# Altium PCB PCB_LogicDesign.PcbDoc
Units mil, origin at the board's own origin, x right, y up, seen from the top; angles counter-clockwise.
Board outline 3385.83 x 2598.43 mil, 2 copper layers (Top Layer, Bottom Layer); 69 components, 46 nets, 202 pads, 8 vias.
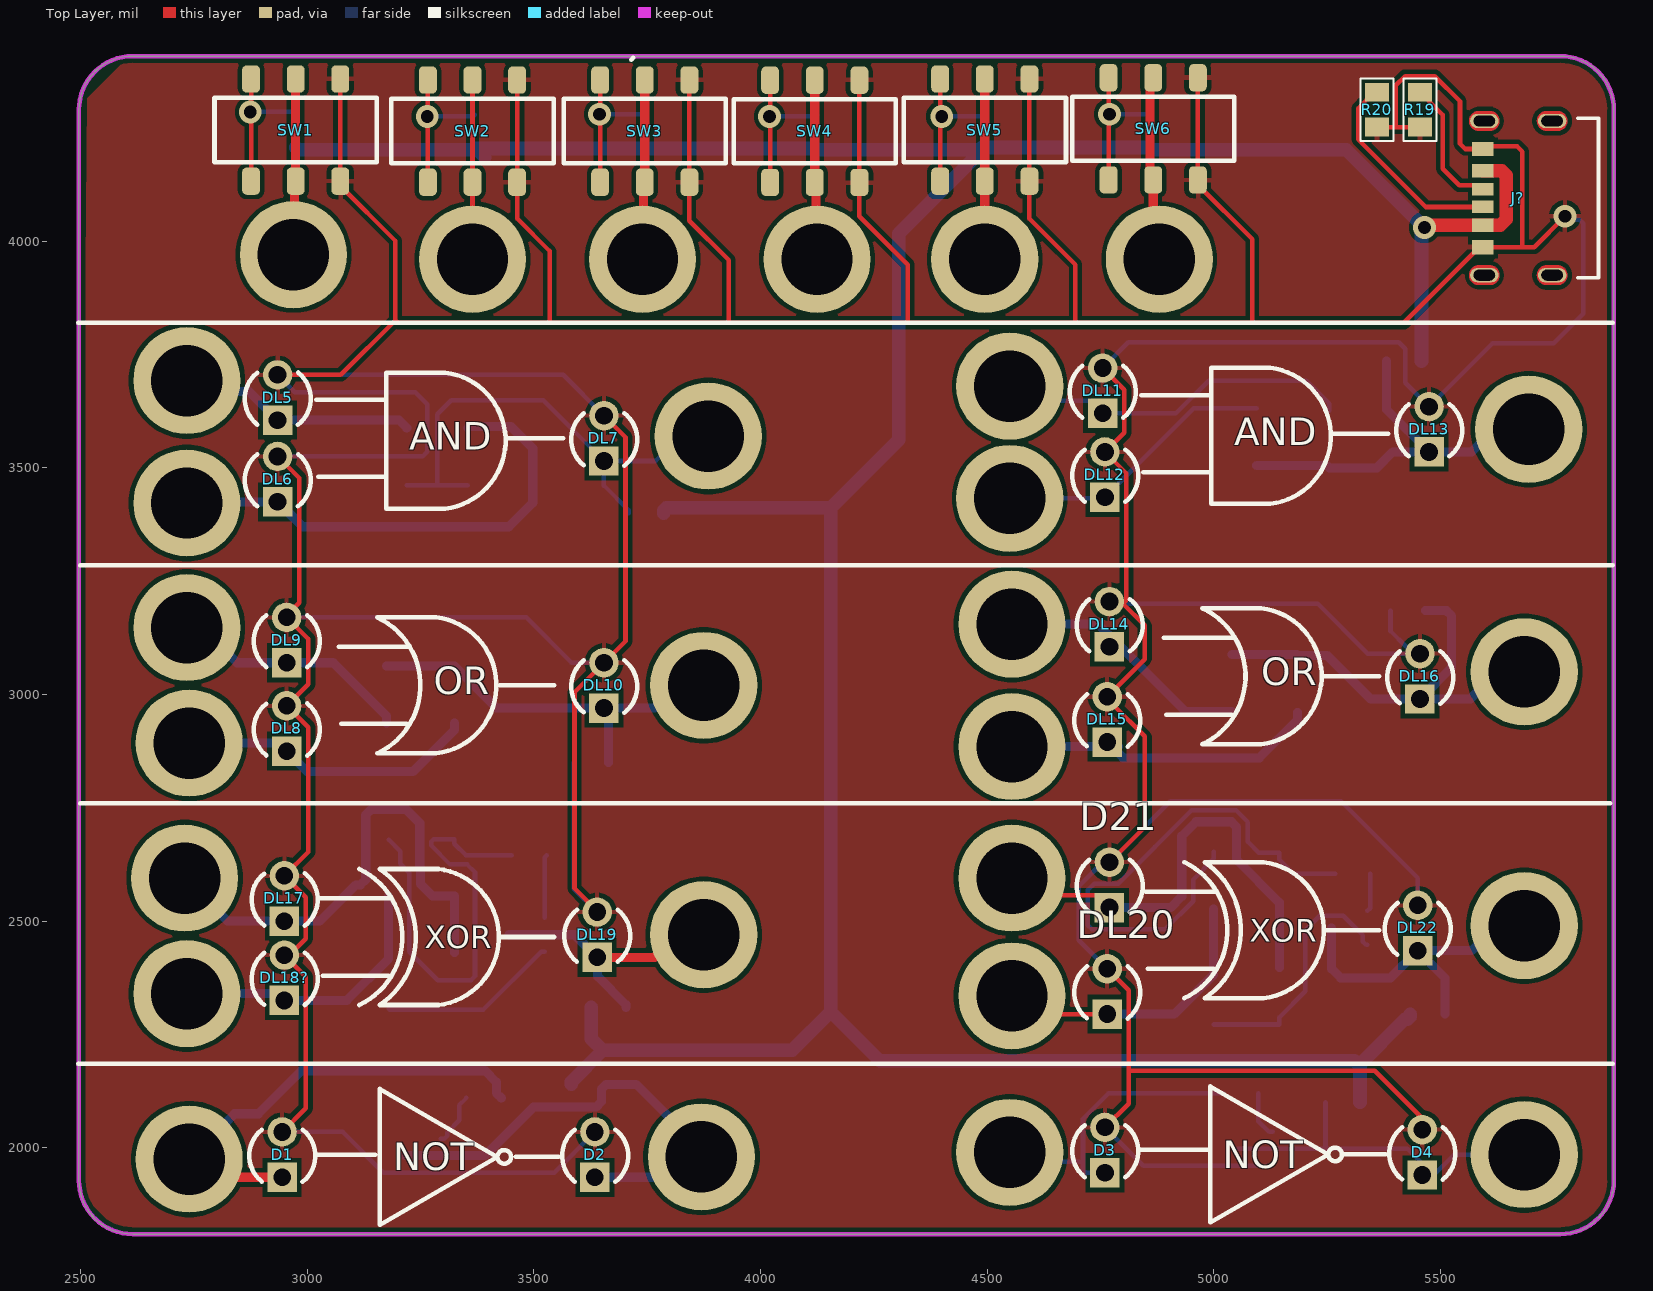
[diagram p0: Top Layer view]
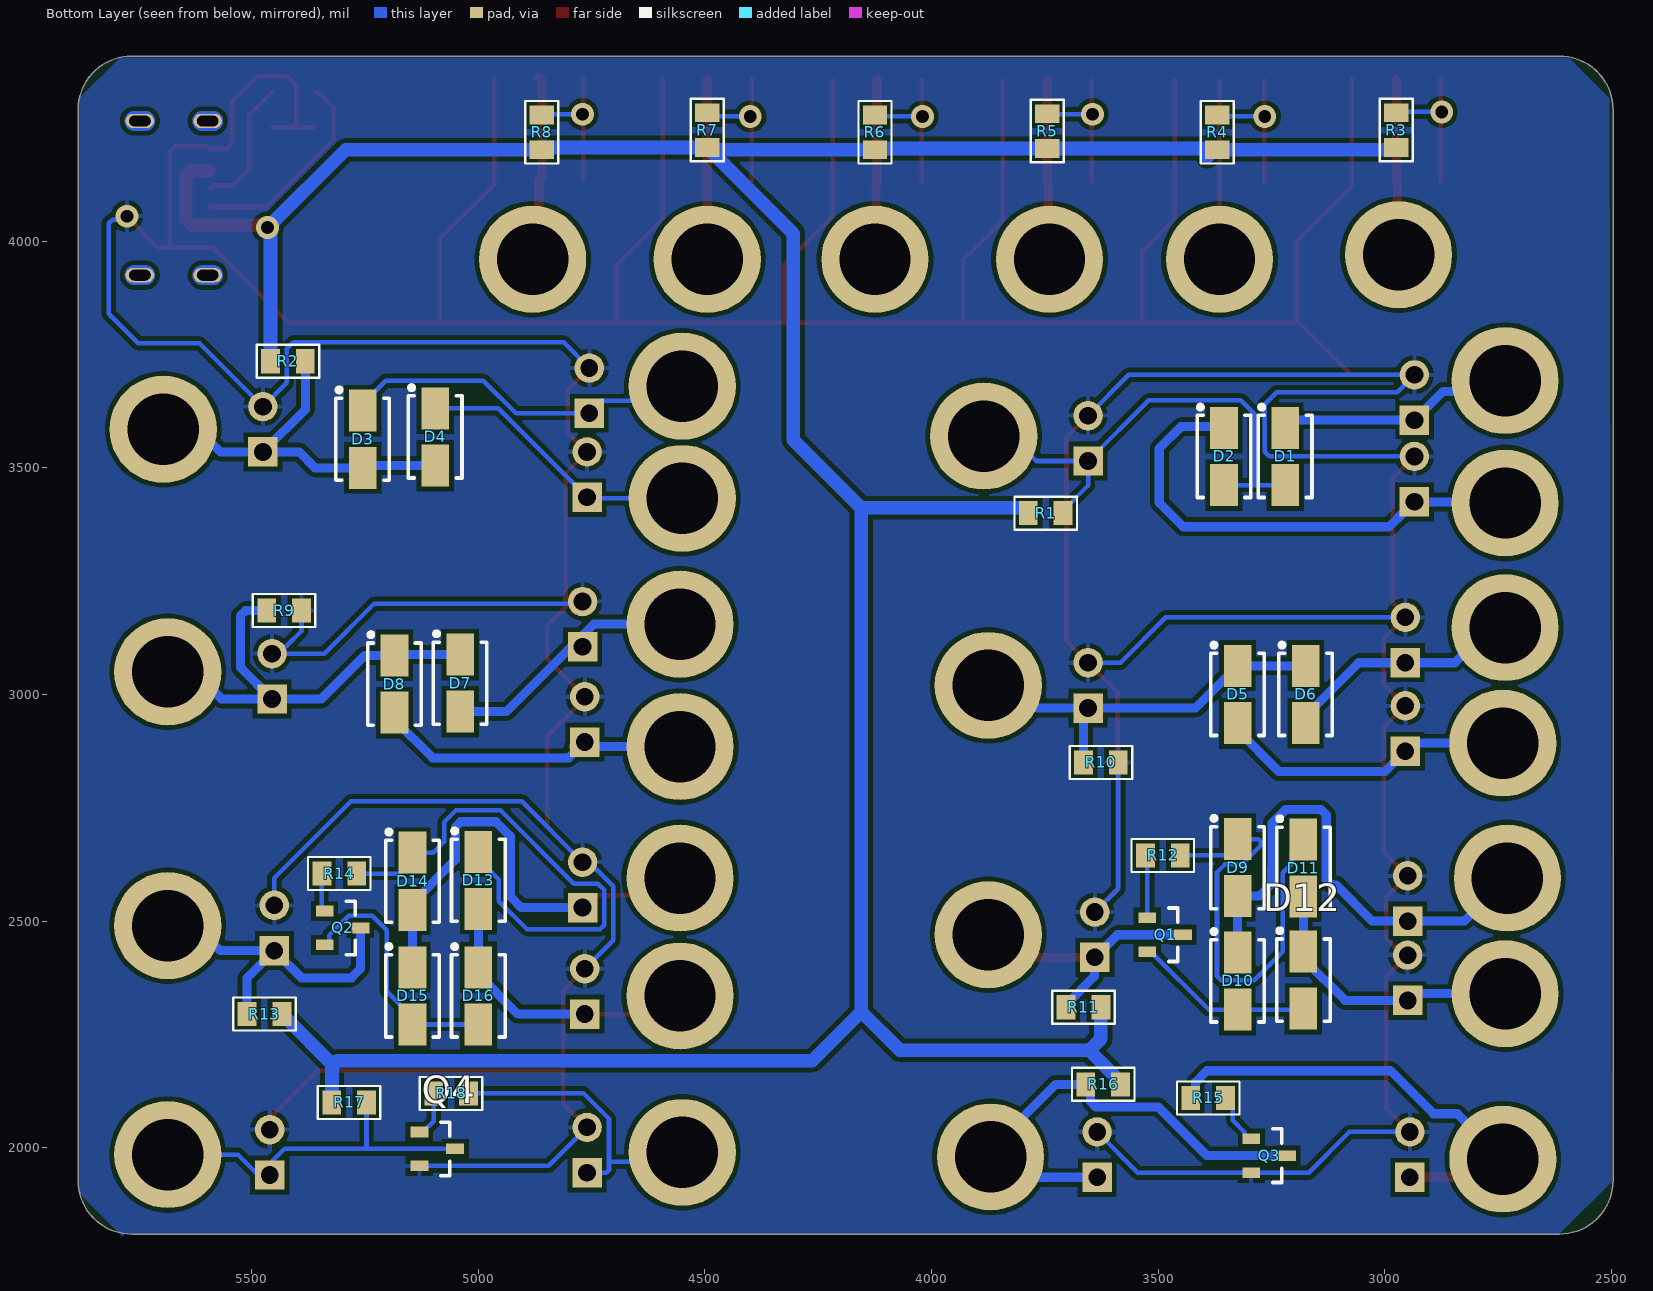
[diagram p1: Bottom Layer view, seen from below]
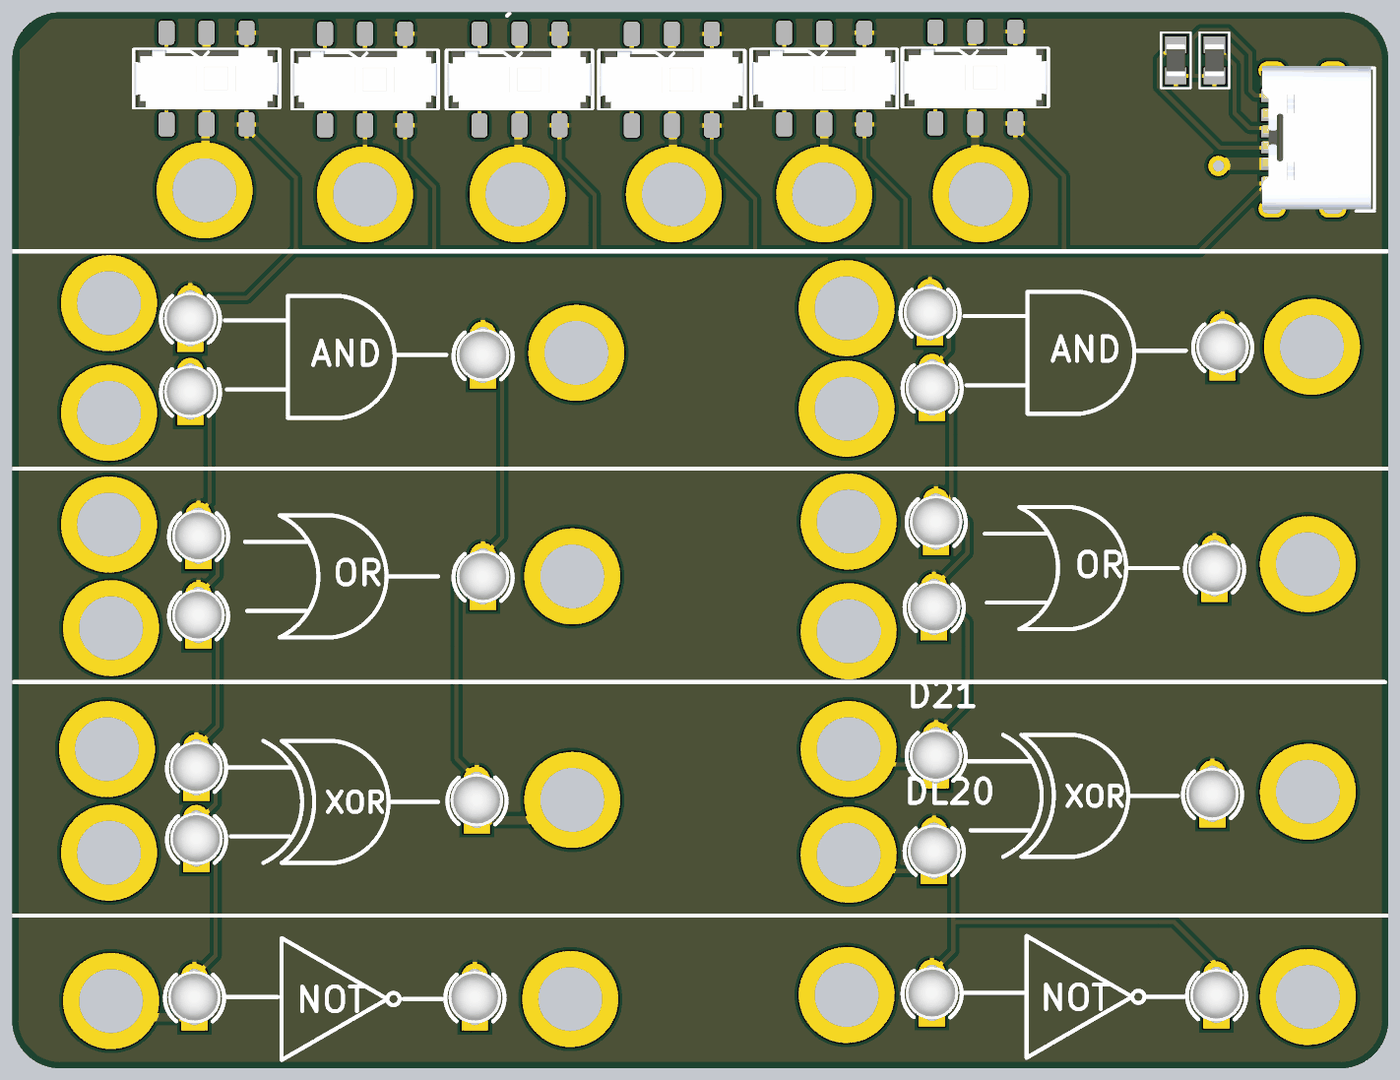
[diagram p2: 3D render of the assembled board from above, using the file's embedded part models]
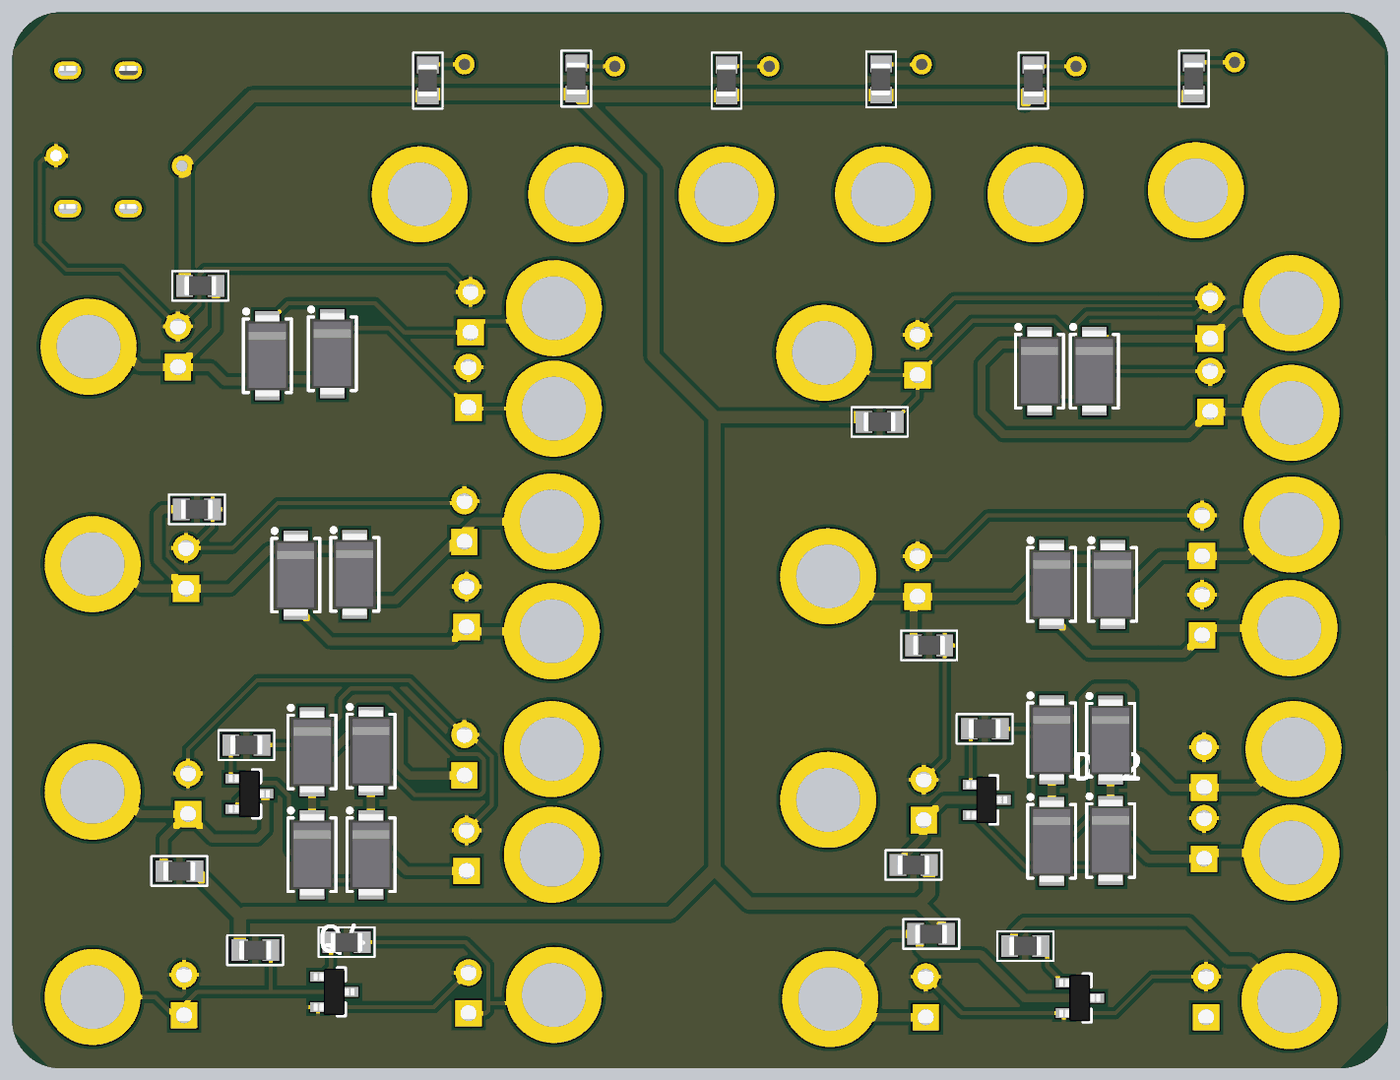
[diagram p3: 3D render of the assembled board from below, using the file's embedded part models]

## Layer stack, top to bottom
Top Solder: solder mask 0.4, Solder Resist, Dk 3.5
Top Layer: signal copper 1.4
Dielectric 1: dielectric 12.6, FR-4, Dk 4.8
Bottom Layer: signal copper 1.4
Bottom Solder: solder mask 0.4, Solder Resist, Dk 3.5

## Board outline
2496.93,1927.83 ccw(c2615.04,1927.83) 2615.04,1809.72 5764.65,1809.72 ccw(c5764.65,1927.83) 5882.76,1927.83 5882.76,4290.04 ccw(c5764.65,4290.04) 5764.65,4408.15 2615.04,4408.15 ccw(c2615.04,4290.04) 2496.93,4290.04

## Design rules (kind name [scope] priority, off if disabled: settings)
Clearance [All] p1: gap=10 ignorepadtopadclearanceinfootprint=FALSE except(0: Arc-Hole Track-Hole SMDPad-Hole THPad-Hole Via-Hole Fill-Hole Poly-Hole Region-Hole Text-Hole)
PolygonConnect [All] p1: connectstyle=Relief reliefconductorwidth=10 reliefentries=4 polygonreliefangle="90 Angle" airgapwidth=10
RoutingVias [All] p1: holewidth=28 width=50 viastyle="Through Hole" minholewidth=28 minwidth=50 maxholewidth=28 maxwidth=50
SolderMaskExpansion [All] p1: expansion=4 istentingtop=FALSE
Width [All] p1: maxlimit=30 minlimit=10 preferedwidth=10 minimp=50.000000 maximp=50.000000 favimp=50.000000
30 further rules are at their usual default settings.

## Classes and differential pairs
component class Sch_LogicDesign: D1 D2 D3 D4 D5 D6 D7 D8 D9 D10 D11 D12 D13 D14 D15 D16 D21 DL5 DL6 DL7 DL8 DL9 DL10 DL11 DL12 DL13 DL14 DL15 DL16 DL17 DL18? DL19 DL20 DL22 J? Q1 Q2 Q3 Q4 R1 R2 R3 R4 R5 R6 R7 R8 R9 R10 R11 R12 R13 R14 R15 R16 R17 R18 R19 R20 SW1 SW2 SW3 SW4 SW5 SW6

## Components (designator, comment, footprint, x,y, rotation, side; value= is the part's Value field where it differs from the comment)
D1 "Led" "LED 3MM - red" 2945,1985 r90 top
D1 "Diode" "DO-214AC (SMA)" 3220,3525 r90 bottom
D2 "Led" "LED 3MM - red" 3635,1985 r90 top
D2 "Diode" "DO-214AC (SMA)" 3355,3525 r90 bottom
D3 "Led" "LED 3MM - red" 4760,1995 r90 top
D3 "Diode" "DO-214AC (SMA)" 5255,3562.99 r90 bottom
D4 "Led" "LED 3MM - red" 5460,1990 r90 top
D4 "Diode" "DO-214AC (SMA)" 5095,3567.99 r90 bottom
D5 "Diode" "DO-214AC (SMA)" 3325,3000 r90 bottom
D6 "Diode" "DO-214AC (SMA)" 3175,3000 r90 bottom
D7 "Diode" "DO-214AC (SMA)" 5040,3025 r90 bottom
D8 "Diode" "DO-214AC (SMA)" 5185,3022.99 r90 bottom
D9 "Diode" "DO-214AC (SMA)" 3325,2617.99 r90 bottom
D10 "Diode" "DO-214AC (SMA)" 3325,2367.99 r90 bottom
D11 "Diode" "DO-214AC (SMA)" 3180,2617.01 r90 bottom
D12 "Diode" "DO-214AC (SMA)" 3180,2370 r90 bottom
D13 "Diode" "DO-214AC (SMA)" 5000,2590 r90 bottom
D14 "Diode" "DO-214AC (SMA)" 5145,2587.99 r90 bottom
D15 "Diode" "DO-214AC (SMA)" 5145,2335 r90 bottom
D16 "Diode" "DO-214AC (SMA)" 5000,2335 r90 bottom
D21 "Led" "LED 3MM - red" 4770,2580 r90 top
DL5 "Led" "LED 3MM - red" 2935,3655 r90 top
DL6 "Led" "LED 3MM - red" 2935,3475 r90 top
DL7 "Led" "LED 3MM - red" 3655,3565 r90 top
DL8 "Led" "LED 3MM - red" 2955,2925 r90 top
DL9 "Led" "LED 3MM - red" 2955,3120 r90 top
DL10 "Led" "LED 3MM - red" 3655,3020 r90 top
DL11 "Led" "LED 3MM - red" 4755,3670 r90 top
DL12 "Led" "LED 3MM - red" 4760,3485 r90 top
DL13 "Led" "LED 3MM - red" 5475,3585 r90 top
DL14 "Led" "LED 3MM - red" 4770,3155 r90 top
DL15 "Led" "LED 3MM - red" 4765,2945 r90 top
DL16 "Led" "LED 3MM - red" 5455,3040 r90 top
DL17 "Led" "LED 3MM - red" 2950,2550 r90 top
DL18? "Led" "LED 3MM - red" 2950,2375 r90 top
DL19 "Led" "LED 3MM - red" 3640,2470 r90 top
DL20 "Led" "LED 3MM - red" 4765,2345 r90 top
DL22 "Led" "LED 3MM - red" 5450,2485 r90 top
J? "USB4125-GF-A-0190_REVA2" GCT_USB4125-GF-A-0190_REVA2 5715,4095 r90 top
Q1 "Transistor NPN" SOT-23 3485,2470 r180 bottom
Q2 "Transistor NPN" SOT-23 5299.37,2485 r180 bottom
Q3 "Transistor NPN" SOT-23 3255.63,1982.6 r180 bottom
Q4 "Transistor NPN" SOT-23 5090.63,1997.6 r180 bottom
R1 "R" "R 0805" 3748.39,3400 r0 bottom
R2 "R" "R 0805" 5420,3735 r0 bottom
R3 "R" "R 0805" 2975,4245 r270 bottom
R4 "R" "R 0805" 3370,4240 r270 bottom
R5 "R" "R 0805" 3745,4242.7 r270 bottom
R6 "R" "R 0805" 4125,4240 r270 bottom
R7 "R" "R 0805" 4495,4245 r270 bottom
R8 "R" "R 0805" 4860,4240 r270 bottom
R9 "R" "R 0805" 5428.39,3185 r0 bottom
R10 "R" "R 0805" 3626.61,2850 r0 bottom
R11 "R" "R 0805" 3665,2310 r180 bottom
R12 "R" "R 0805" 3490,2645 r0 bottom
R13 "R" "R 0805" 5471.61,2295 r180 bottom
R14 "R" "R 0805" 5306.61,2605 r0 bottom
R15 "R" "R 0805" 3390,2110 r0 bottom
R16 "R" "R 0805" 3621.61,2140 r180 bottom
R17 "R" "R 0805" 5285,2100 r0 bottom
R18 "R" "R 0805" 5060,2120 r180 bottom
R19 "R" "R 0805" 5455,4290 r90 top
R20 "R" "R 0805" 5360,4290 r90 top
SW1 "SW 22D18G2" MST22D18G2 2975,4245 r180 top
SW2 "SW 22D18G2" MST22D18G2 3365,4242.7 r180 top
SW3 "SW 22D18G2" MST22D18G2 3745,4242.7 r180 top
SW4 "SW 22D18G2" MST22D18G2 4120,4242.3 r180 top
SW5 "SW 22D18G2" MST22D18G2 4495,4245 r180 top
SW6 "SW 22D18G2" MST22D18G2 4866.57,4247.7 r180 top

## Footprints (in the part's own frame and the unit in brackets; to place one, negate y for a bottom-side part, rotate by r counter-clockwise, add the part's x,y. Pads: shape width x height; smd on the part's side, far side on the other; paste and mask are expansions set on the pad)
"DO-214AC (SMA)" [mm] "Molded Diode, 2-Leads, Body 4.3x2.7mm, IPC Medium Density"
  rect 2.35x1.55 smd: 1(-1.6,0) 2(1.6,0)
  silkscreen extent -2.3,-1.5 2.89,1.5, body extent -2.6,-1.3 2.6,1.3, height 2.4
GCT_USB4125-GF-A-0190_REVA2 [mm]
  rect 0.7x1.2 smd: A5(-0.5,3.08) B5(0.5,3.08)
  rect 0.76x1.2 smd: A9(1.52,3.08) B9(-1.52,3.08)
  rect 0.8x1.2 smd: A12(2.75,3.08) B12(-2.75,3.08)
  oval 0.8x1.6 hole 0.6 slot 1.2 at 90 deg mask+0: S1(-4.32,3) S2(4.32,3) S3(-4.32,-0.8) S4(4.32,-0.8)
  Top Layer region: 4.349,3.849 4.377,3.847 4.406,3.843 4.434,3.838 4.462,3.831 4.49,3.823 4.517,3.813 4.544,3.802 4.57,3.79 4.595,3.776 4.62,3.761 4.643,3.745 4.666,3.727 4.688,3.709 4.709,3.689 4.729,3.668 4.747,3.646 4.765,3.623 4.781,3.6 4.796,3.575 4.81,3.55 4.822,3.524 4.833,3.497 4.843,3.47 4.851,3.442 4.858,3.414 4.863,3.386 4.867,3.357 4.869,3.329 4.87,3.3 4.87,2.7 4.869,2.671 4.867,2.643 4.863,2.614 4.858,2.586 4.851,2.558 4.843,2.53 4.833,2.503 4.822,2.476 4.81,2.45 4.796,2.425 4.781,2.4 4.765,2.377 4.747,2.354 4.729,2.332 4.709,2.311 4.688,2.291 4.666,2.273 4.643,2.255 4.62,2.239 4.595,2.224 4.57,2.21 4.544,2.198 4.517,2.187 4.49,2.177 4.462,2.169 4.434,2.162 4.406,2.157 4.377,2.153 4.349,2.151 4.32,2.15 4.291,2.151 4.263,2.153 4.234,2.157 4.206,2.162 4.178,2.169 4.15,2.177 4.123,2.187 4.096,2.198 4.07,2.21 4.045,2.224 4.02,2.239 3.997,2.255 3.974,2.273 3.952,2.291 3.931,2.311 3.911,2.332 3.893,2.354 3.875,2.377 3.859,2.4 3.844,2.425 3.83,2.45 3.818,2.476 3.807,2.503 3.797,2.53 3.789,2.558 3.782,2.586 3.777,2.614 3.773,2.643 3.771,2.671 3.77,2.7 3.77,3.3 3.771,3.329 3.773,3.357 3.777,3.386 3.782,3.414 3.789,3.442 3.797,3.47 3.807,3.497 3.818,3.524 3.83,3.55 3.844,3.575 3.859,3.6 3.875,3.623 3.893,3.646 3.911,3.668 3.931,3.689 3.952,3.709 3.974,3.727 3.997,3.745 4.02,3.761 4.045,3.776 4.07,3.79 4.096,3.802 4.123,3.813 4.15,3.823 4.178,3.831 4.206,3.838 4.234,3.843 4.263,3.847 4.291,3.849 4.32,3.85
  Top Layer region: -4.291,3.849 -4.263,3.847 -4.234,3.843 -4.206,3.838 -4.178,3.831 -4.15,3.823 -4.123,3.813 -4.096,3.802 -4.07,3.79 -4.045,3.776 -4.02,3.761 -3.997,3.745 -3.974,3.727 -3.952,3.709 -3.931,3.689 -3.911,3.668 -3.893,3.646 -3.875,3.623 -3.859,3.6 -3.844,3.575 -3.83,3.55 -3.818,3.524 -3.807,3.497 -3.797,3.47 -3.789,3.442 -3.782,3.414 -3.777,3.386 -3.773,3.357 -3.771,3.329 -3.77,3.3 -3.77,2.7 -3.771,2.671 -3.773,2.643 -3.777,2.614 -3.782,2.586 -3.789,2.558 -3.797,2.53 -3.807,2.503 -3.818,2.476 -3.83,2.45 -3.844,2.425 -3.859,2.4 -3.875,2.377 -3.893,2.354 -3.911,2.332 -3.931,2.311 -3.952,2.291 -3.974,2.273 -3.997,2.255 -4.02,2.239 -4.045,2.224 -4.07,2.21 -4.096,2.198 -4.123,2.187 -4.15,2.177 -4.178,2.169 -4.206,2.162 -4.234,2.157 -4.263,2.153 -4.291,2.151 -4.32,2.15 -4.349,2.151 -4.377,2.153 -4.406,2.157 -4.434,2.162 -4.462,2.169 -4.49,2.177 -4.517,2.187 -4.544,2.198 -4.57,2.21 -4.595,2.224 -4.62,2.239 -4.643,2.255 -4.666,2.273 -4.688,2.291 -4.709,2.311 -4.729,2.332 -4.747,2.354 -4.765,2.377 -4.781,2.4 -4.796,2.425 -4.81,2.45 -4.822,2.476 -4.833,2.503 -4.843,2.53 -4.851,2.558 -4.858,2.586 -4.863,2.614 -4.867,2.643 -4.869,2.671 -4.87,2.7 -4.87,3.3 -4.869,3.329 -4.867,3.357 -4.863,3.386 -4.858,3.414 -4.851,3.442 -4.843,3.47 -4.833,3.497 -4.822,3.524 -4.81,3.55 -4.796,3.575 -4.781,3.6 -4.765,3.623 -4.747,3.646 -4.729,3.668 -4.709,3.689 -4.688,3.709 -4.666,3.727 -4.643,3.745 -4.62,3.761 -4.595,3.776 -4.57,3.79 -4.544,3.802 -4.517,3.813 -4.49,3.823 -4.462,3.831 -4.434,3.838 -4.406,3.843 -4.377,3.847 -4.349,3.849 -4.32,3.85
  Top Layer region: 4.349,0.049 4.377,0.047 4.406,0.043 4.434,0.038 4.462,0.031 4.49,0.023 4.517,0.013 4.544,0.002 4.57,-0.01 4.595,-0.024 4.62,-0.039 4.643,-0.055 4.666,-0.073 4.688,-0.091 4.709,-0.111 4.729,-0.132 4.747,-0.154 4.765,-0.177 4.781,-0.2 4.796,-0.225 4.81,-0.25 4.822,-0.276 4.833,-0.303 4.843,-0.33 4.851,-0.358 4.858,-0.386 4.863,-0.414 4.867,-0.443 4.869,-0.471 4.87,-0.5 4.87,-1.1 4.869,-1.129 4.867,-1.157 4.863,-1.186 4.858,-1.214 4.851,-1.242 4.843,-1.27 4.833,-1.297 4.822,-1.324 4.81,-1.35 4.796,-1.375 4.781,-1.4 4.765,-1.423 4.747,-1.446 4.729,-1.468 4.709,-1.489 4.688,-1.509 4.666,-1.527 4.643,-1.545 4.62,-1.561 4.595,-1.576 4.57,-1.59 4.544,-1.602 4.517,-1.613 4.49,-1.623 4.462,-1.631 4.434,-1.638 4.406,-1.643 4.377,-1.647 4.349,-1.649 4.32,-1.65 4.291,-1.649 4.263,-1.647 4.234,-1.643 4.206,-1.638 4.178,-1.631 4.15,-1.623 4.123,-1.613 4.096,-1.602 4.07,-1.59 4.045,-1.576 4.02,-1.561 3.997,-1.545 3.974,-1.527 3.952,-1.509 3.931,-1.489 3.911,-1.468 3.893,-1.446 3.875,-1.423 3.859,-1.4 3.844,-1.375 3.83,-1.35 3.818,-1.324 3.807,-1.297 3.797,-1.27 3.789,-1.242 3.782,-1.214 3.777,-1.186 3.773,-1.157 3.771,-1.129 3.77,-1.1 3.77,-0.5 3.771,-0.471 3.773,-0.443 3.777,-0.414 3.782,-0.386 3.789,-0.358 3.797,-0.33 3.807,-0.303 3.818,-0.276 3.83,-0.25 3.844,-0.225 3.859,-0.2 3.875,-0.177 3.893,-0.154 3.911,-0.132 3.931,-0.111 3.952,-0.091 3.974,-0.073 3.997,-0.055 4.02,-0.039 4.045,-0.024 4.07,-0.01 4.096,0.002 4.123,0.013 4.15,0.023 4.178,0.031 4.206,0.038 4.234,0.043 4.263,0.047 4.291,0.049 4.32,0.05
  Top Layer region: -4.291,0.049 -4.263,0.047 -4.234,0.043 -4.206,0.038 -4.178,0.031 -4.15,0.023 -4.123,0.013 -4.096,0.002 -4.07,-0.01 -4.045,-0.024 -4.02,-0.039 -3.997,-0.055 -3.974,-0.073 -3.952,-0.091 -3.931,-0.111 -3.911,-0.132 -3.893,-0.154 -3.875,-0.177 -3.859,-0.2 -3.844,-0.225 -3.83,-0.25 -3.818,-0.276 -3.807,-0.303 -3.797,-0.33 -3.789,-0.358 -3.782,-0.386 -3.777,-0.414 -3.773,-0.443 -3.771,-0.471 -3.77,-0.5 -3.77,-1.1 -3.771,-1.129 -3.773,-1.157 -3.777,-1.186 -3.782,-1.214 -3.789,-1.242 -3.797,-1.27 -3.807,-1.297 -3.818,-1.324 -3.83,-1.35 -3.844,-1.375 -3.859,-1.4 -3.875,-1.423 -3.893,-1.446 -3.911,-1.468 -3.931,-1.489 -3.952,-1.509 -3.974,-1.527 -3.997,-1.545 -4.02,-1.561 -4.045,-1.576 -4.07,-1.59 -4.096,-1.602 -4.123,-1.613 -4.15,-1.623 -4.178,-1.631 -4.206,-1.638 -4.234,-1.643 -4.263,-1.647 -4.291,-1.649 -4.32,-1.65 -4.349,-1.649 -4.377,-1.647 -4.406,-1.643 -4.434,-1.638 -4.462,-1.631 -4.49,-1.623 -4.517,-1.613 -4.544,-1.602 -4.57,-1.59 -4.595,-1.576 -4.62,-1.561 -4.643,-1.545 -4.666,-1.527 -4.688,-1.509 -4.709,-1.489 -4.729,-1.468 -4.747,-1.446 -4.765,-1.423 -4.781,-1.4 -4.796,-1.375 -4.81,-1.35 -4.822,-1.324 -4.833,-1.297 -4.843,-1.27 -4.851,-1.242 -4.858,-1.214 -4.863,-1.186 -4.867,-1.157 -4.869,-1.129 -4.87,-1.1 -4.87,-0.5 -4.869,-0.471 -4.867,-0.443 -4.863,-0.414 -4.858,-0.386 -4.851,-0.358 -4.843,-0.33 -4.833,-0.303 -4.822,-0.276 -4.81,-0.25 -4.796,-0.225 -4.781,-0.2 -4.765,-0.177 -4.747,-0.154 -4.729,-0.132 -4.709,-0.111 -4.688,-0.091 -4.666,-0.073 -4.643,-0.055 -4.62,-0.039 -4.595,-0.024 -4.57,-0.01 -4.544,0.002 -4.517,0.013 -4.49,0.023 -4.462,0.031 -4.434,0.038 -4.406,0.043 -4.377,0.047 -4.349,0.049 -4.32,0.05
  Bottom Layer region: 4.349,3.849 4.377,3.847 4.406,3.843 4.434,3.838 4.462,3.831 4.49,3.823 4.517,3.813 4.544,3.802 4.57,3.79 4.595,3.776 4.62,3.761 4.643,3.745 4.666,3.727 4.688,3.709 4.709,3.689 4.729,3.668 4.747,3.646 4.765,3.623 4.781,3.6 4.796,3.575 4.81,3.55 4.822,3.524 4.833,3.497 4.843,3.47 4.851,3.442 4.858,3.414 4.863,3.386 4.867,3.357 4.869,3.329 4.87,3.3 4.87,2.7 4.869,2.671 4.867,2.643 4.863,2.614 4.858,2.586 4.851,2.558 4.843,2.53 4.833,2.503 4.822,2.476 4.81,2.45 4.796,2.425 4.781,2.4 4.765,2.377 4.747,2.354 4.729,2.332 4.709,2.311 4.688,2.291 4.666,2.273 4.643,2.255 4.62,2.239 4.595,2.224 4.57,2.21 4.544,2.198 4.517,2.187 4.49,2.177 4.462,2.169 4.434,2.162 4.406,2.157 4.377,2.153 4.349,2.151 4.32,2.15 4.291,2.151 4.263,2.153 4.234,2.157 4.206,2.162 4.178,2.169 4.15,2.177 4.123,2.187 4.096,2.198 4.07,2.21 4.045,2.224 4.02,2.239 3.997,2.255 3.974,2.273 3.952,2.291 3.931,2.311 3.911,2.332 3.893,2.354 3.875,2.377 3.859,2.4 3.844,2.425 3.83,2.45 3.818,2.476 3.807,2.503 3.797,2.53 3.789,2.558 3.782,2.586 3.777,2.614 3.773,2.643 3.771,2.671 3.77,2.7 3.77,3.3 3.771,3.329 3.773,3.357 3.777,3.386 3.782,3.414 3.789,3.442 3.797,3.47 3.807,3.497 3.818,3.524 3.83,3.55 3.844,3.575 3.859,3.6 3.875,3.623 3.893,3.646 3.911,3.668 3.931,3.689 3.952,3.709 3.974,3.727 3.997,3.745 4.02,3.761 4.045,3.776 4.07,3.79 4.096,3.802 4.123,3.813 4.15,3.823 4.178,3.831 4.206,3.838 4.234,3.843 4.263,3.847 4.291,3.849 4.32,3.85
  Bottom Layer region: -4.291,3.849 -4.263,3.847 -4.234,3.843 -4.206,3.838 -4.178,3.831 -4.15,3.823 -4.123,3.813 -4.096,3.802 -4.07,3.79 -4.045,3.776 -4.02,3.761 -3.997,3.745 -3.974,3.727 -3.952,3.709 -3.931,3.689 -3.911,3.668 -3.893,3.646 -3.875,3.623 -3.859,3.6 -3.844,3.575 -3.83,3.55 -3.818,3.524 -3.807,3.497 -3.797,3.47 -3.789,3.442 -3.782,3.414 -3.777,3.386 -3.773,3.357 -3.771,3.329 -3.77,3.3 -3.77,2.7 -3.771,2.671 -3.773,2.643 -3.777,2.614 -3.782,2.586 -3.789,2.558 -3.797,2.53 -3.807,2.503 -3.818,2.476 -3.83,2.45 -3.844,2.425 -3.859,2.4 -3.875,2.377 -3.893,2.354 -3.911,2.332 -3.931,2.311 -3.952,2.291 -3.974,2.273 -3.997,2.255 -4.02,2.239 -4.045,2.224 -4.07,2.21 -4.096,2.198 -4.123,2.187 -4.15,2.177 -4.178,2.169 -4.206,2.162 -4.234,2.157 -4.263,2.153 -4.291,2.151 -4.32,2.15 -4.349,2.151 -4.377,2.153 -4.406,2.157 -4.434,2.162 -4.462,2.169 -4.49,2.177 -4.517,2.187 -4.544,2.198 -4.57,2.21 -4.595,2.224 -4.62,2.239 -4.643,2.255 -4.666,2.273 -4.688,2.291 -4.709,2.311 -4.729,2.332 -4.747,2.354 -4.765,2.377 -4.781,2.4 -4.796,2.425 -4.81,2.45 -4.822,2.476 -4.833,2.503 -4.843,2.53 -4.851,2.558 -4.858,2.586 -4.863,2.614 -4.867,2.643 -4.869,2.671 -4.87,2.7 -4.87,3.3 -4.869,3.329 -4.867,3.357 -4.863,3.386 -4.858,3.414 -4.851,3.442 -4.843,3.47 -4.833,3.497 -4.822,3.524 -4.81,3.55 -4.796,3.575 -4.781,3.6 -4.765,3.623 -4.747,3.646 -4.729,3.668 -4.709,3.689 -4.688,3.709 -4.666,3.727 -4.643,3.745 -4.62,3.761 -4.595,3.776 -4.57,3.79 -4.544,3.802 -4.517,3.813 -4.49,3.823 -4.462,3.831 -4.434,3.838 -4.406,3.843 -4.377,3.847 -4.349,3.849 -4.32,3.85
  Bottom Layer region: 4.349,0.049 4.377,0.047 4.406,0.043 4.434,0.038 4.462,0.031 4.49,0.023 4.517,0.013 4.544,0.002 4.57,-0.01 4.595,-0.024 4.62,-0.039 4.643,-0.055 4.666,-0.073 4.688,-0.091 4.709,-0.111 4.729,-0.132 4.747,-0.154 4.765,-0.177 4.781,-0.2 4.796,-0.225 4.81,-0.25 4.822,-0.276 4.833,-0.303 4.843,-0.33 4.851,-0.358 4.858,-0.386 4.863,-0.414 4.867,-0.443 4.869,-0.471 4.87,-0.5 4.87,-1.1 4.869,-1.129 4.867,-1.157 4.863,-1.186 4.858,-1.214 4.851,-1.242 4.843,-1.27 4.833,-1.297 4.822,-1.324 4.81,-1.35 4.796,-1.375 4.781,-1.4 4.765,-1.423 4.747,-1.446 4.729,-1.468 4.709,-1.489 4.688,-1.509 4.666,-1.527 4.643,-1.545 4.62,-1.561 4.595,-1.576 4.57,-1.59 4.544,-1.602 4.517,-1.613 4.49,-1.623 4.462,-1.631 4.434,-1.638 4.406,-1.643 4.377,-1.647 4.349,-1.649 4.32,-1.65 4.291,-1.649 4.263,-1.647 4.234,-1.643 4.206,-1.638 4.178,-1.631 4.15,-1.623 4.123,-1.613 4.096,-1.602 4.07,-1.59 4.045,-1.576 4.02,-1.561 3.997,-1.545 3.974,-1.527 3.952,-1.509 3.931,-1.489 3.911,-1.468 3.893,-1.446 3.875,-1.423 3.859,-1.4 3.844,-1.375 3.83,-1.35 3.818,-1.324 3.807,-1.297 3.797,-1.27 3.789,-1.242 3.782,-1.214 3.777,-1.186 3.773,-1.157 3.771,-1.129 3.77,-1.1 3.77,-0.5 3.771,-0.471 3.773,-0.443 3.777,-0.414 3.782,-0.386 3.789,-0.358 3.797,-0.33 3.807,-0.303 3.818,-0.276 3.83,-0.25 3.844,-0.225 3.859,-0.2 3.875,-0.177 3.893,-0.154 3.911,-0.132 3.931,-0.111 3.952,-0.091 3.974,-0.073 3.997,-0.055 4.02,-0.039 4.045,-0.024 4.07,-0.01 4.096,0.002 4.123,0.013 4.15,0.023 4.178,0.031 4.206,0.038 4.234,0.043 4.263,0.047 4.291,0.049 4.32,0.05
  Bottom Layer region: -4.291,0.049 -4.263,0.047 -4.234,0.043 -4.206,0.038 -4.178,0.031 -4.15,0.023 -4.123,0.013 -4.096,0.002 -4.07,-0.01 -4.045,-0.024 -4.02,-0.039 -3.997,-0.055 -3.974,-0.073 -3.952,-0.091 -3.931,-0.111 -3.911,-0.132 -3.893,-0.154 -3.875,-0.177 -3.859,-0.2 -3.844,-0.225 -3.83,-0.25 -3.818,-0.276 -3.807,-0.303 -3.797,-0.33 -3.789,-0.358 -3.782,-0.386 -3.777,-0.414 -3.773,-0.443 -3.771,-0.471 -3.77,-0.5 -3.77,-1.1 -3.771,-1.129 -3.773,-1.157 -3.777,-1.186 -3.782,-1.214 -3.789,-1.242 -3.797,-1.27 -3.807,-1.297 -3.818,-1.324 -3.83,-1.35 -3.844,-1.375 -3.859,-1.4 -3.875,-1.423 -3.893,-1.446 -3.911,-1.468 -3.931,-1.489 -3.952,-1.509 -3.974,-1.527 -3.997,-1.545 -4.02,-1.561 -4.045,-1.576 -4.07,-1.59 -4.096,-1.602 -4.123,-1.613 -4.15,-1.623 -4.178,-1.631 -4.206,-1.638 -4.234,-1.643 -4.263,-1.647 -4.291,-1.649 -4.32,-1.65 -4.349,-1.649 -4.377,-1.647 -4.406,-1.643 -4.434,-1.638 -4.462,-1.631 -4.49,-1.623 -4.517,-1.613 -4.544,-1.602 -4.57,-1.59 -4.595,-1.576 -4.62,-1.561 -4.643,-1.545 -4.666,-1.527 -4.688,-1.509 -4.709,-1.489 -4.729,-1.468 -4.747,-1.446 -4.765,-1.423 -4.781,-1.4 -4.796,-1.375 -4.81,-1.35 -4.822,-1.324 -4.833,-1.297 -4.843,-1.27 -4.851,-1.242 -4.858,-1.214 -4.863,-1.186 -4.867,-1.157 -4.869,-1.129 -4.87,-1.1 -4.87,-0.5 -4.869,-0.471 -4.867,-0.443 -4.863,-0.414 -4.858,-0.386 -4.851,-0.358 -4.843,-0.33 -4.833,-0.303 -4.822,-0.276 -4.81,-0.25 -4.796,-0.225 -4.781,-0.2 -4.765,-0.177 -4.747,-0.154 -4.729,-0.132 -4.709,-0.111 -4.688,-0.091 -4.666,-0.073 -4.643,-0.055 -4.62,-0.039 -4.595,-0.024 -4.57,-0.01 -4.544,0.002 -4.517,0.013 -4.49,0.023 -4.462,0.031 -4.434,0.038 -4.406,0.043 -4.377,0.047 -4.349,0.049 -4.32,0.05
  silkscreen extent -4.47,-3.4 4.47,-2.25, body extent -4.34,-3.2 4.6,3.7, height 3.26
"LED 3MM - red" [mil]
  rect 65x65 hole 39: 1(-50,0)
  round 65 hole 39: 2(50,0)
  silkscreen extent -60,-73 55,72, body extent -66,-65 64,65, height 207
MST22D18G2 [mm]
  rrect50% 1x1.525 smd: 1(-2.5,2.863) 1(-2.5,-2.863) 2(0,2.863) 2(0,-2.863) 3(2.5,2.863) 3(2.5,-2.863)
  silkscreen extent -4.55,-1.8 4.55,1.8, body extent -4.5,-1.8 4.5,1.8, height 5.5
"R 0805" [mm] "Chip Resistor, 2-Leads, Body 2.0x1.3mm, IPC Medium Density"
  rect 1.05x1.35 smd: 1(-0.975,0) 2(0.975,0)
  silkscreen extent -1.75,-0.92 1.75,0.92, body extent -1,-0.61 1,0.59, height 0.5
SOT-23 [mm] "SOT23, 3-Leads, Body 3.0x2.5mm (max), Pitch 0.95mm, IPC Medium Density"
  rect 1x0.6 smd: 1(-1,0.95) 2(-1,-0.95) 3(1,0)
  silkscreen extent 0.2,-1.5 0.7,1.5, body extent -1.28,-1.46 1.27,1.46, height 0.95

## Part data
D1 D2 D3 D4 D21 DL5 DL6 DL7 DL8 DL9 DL10 DL11 DL12 DL13 DL14 DL15 DL16 DL17 DL18? DL19 DL20 DL22: "Typical LED"
D1 D2 D3 D4 D5 D6 D7 D8 D9 D10 D11 D12 D13 D14 D15 D16: "Default Diode"
J?: "Type C Receptacle, Horizontal, SMT, For Power Charging Only", PACKAGE=None, Availability="No availability data", Check_prices=https://www.snapeda.com/parts/USB4125-GF-A-0190/Global%20Connector%20Technology/view-part/6227012/?ref=eda, MF="Global Connector Technology", MP=USB4125-GF-A-0190, Price=None, SnapEDA_Link=https://www.snapeda.com/parts/USB4125-GF-A-0190/Global%20Connector%20Technology/view-part/6227012/?ref=snap
Q1 Q2 Q3 Q4: "NPN Bipolar Transistor"
R1 R2 R3 R4 R5 R6 R7 R8 R9 R10 R11 R12 R13 R14 R15 R16 R17 R18 R19 R20: library part Resistor, "Resistor"

## Free pads (board coordinates)
  round 236.22 hole 157.48: 2(2730,2595) 2(2735,2340) 2(2735,3147.6) 2(2735,3422.35) 2(2735,3692.35) 2(2740,1975) 2(2740,2892.6) 2(2970,3970) 2(3365,3960) 2(3740,3960) 2(3870,1980) 2(3875,2470) 2(3875,3020) 2(3885,3570) 2(4125,3960) 2(4495,3960) 2(4550,1990) 2(4550,3432.6) 2(4550,3680) 2(4555,2335) 2(4555,2595) 2(4555,2885) 2(4555,3155) 2(4880,3960) 2(5685,1985) 2(5685,2490) 2(5685,3050) 2(5695,3585)

## Via types
v1: diameter 50, hole 28, Top Layer to Bottom Layer, 8 vias

## Nets (pads, with @x,y where several pads share a name; then routed paths per layer and width w, separated by ;. In a path a pad name is that pad's centre, name@x,y a point inside that pad or via, vN(x,y) a via of type N, cw(c..) or ccw(c..) an arc to the next point about the centre after c; other vN are vias at no path point)
+5: J?.A9 J?.B9 R1.2 R2.2 R3.2 R4.2 R5.2 R6.2 R7.2 R8.2 R11.2 R13.2 R16.2 R17.2 | length 7851.5
  Top Layer w30: v1(5465,4030) 5470.41,4030 5475.57,4035.16 5632.14,4035.16 5645.16,4048.18 5645.16,4144.84 5635.16,4154.84 J?.A9@5593.76,4154.84
  Bottom Layer w30: R3.2 2980,4201.61 R4.2 3372.7,4204.31 R4.2@3373.21,4204.31 ; R4.2@3391.57,4185.43 3391.57,4185.94 R4.2@3373.21,4204.31 ; R16.2 3583.23,2145.91 3652.32,2215 ; R11.2 3626.61,2240.71 3652.32,2215 ; R1.2 3786.77,3405.91 3792.44,3411.57 4155,3411.57 ; R7.2@4484.09,4201.61 R6.2 4122.3,4204.31 R5.2 R4.2@3373.21,4204.31 ; R17.2@5322.76,2100.63 5322.76,2179.6 5310.47,2191.89 4263.11,2191.89 4155,2300 ; 5322.76,2184.53 5421.65,2283.43 5427.56,2283.43 5433.23,2289.09 R13.2 ; R2.2 5458.39,4017.97 5465,4024.59 v1(5465,4030) 5464.18,4030 5292.56,4201.61 R8.2 4855,4206.61 4489.09,4206.61 4483.43,4200.94 4483.43,4195.04 4305,4016.61 4305,3561.57 4155,3411.57 ; 3652.32,2215 4070,2215 4155,2300 ; 4155,2300 4155,3411.57
AND_IN1: D1.2@3220,3587.99 DL5.1 pad.2@2735,3692.35 | length 528.2
  Bottom Layer w20: pad.2@2735,3692.35 2758.74,3668.61 2871.39,3668.61 DL5.1 3202.99,3605 D1.2@3220,3587.99
AND_IN2: D2.2@3355,3587.99 DL6.1 pad.2@2735,3422.35 | length 1092.1
  Bottom Layer w20: pad.2@2735,3422.35 2737.65,3425 DL6.1 ; DL6.1@2935.51,3425 2935.51,3424.49 2957.5,3402.5 2958.01,3402.5 2990.51,3370 3445,3370 3497.86,3422.86 3497.86,3542.65 3449.86,3590.65 3357.65,3590.65 D2.2@3355,3587.99
AND_IN3: D3.2@5255,3625.98 DL11.1 pad.2@4550,3680 | length 796.4
  Bottom Layer w10: pad.2@4550,3680 4582.5,3647.5 4727.5,3647.5 DL11.1 4916.72,3620 4988.96,3692.24 5204.49,3692.24 5255,3641.73 D3.2@5255,3625.98
AND_IN4: D4.2@5095,3630.98 DL12.1 pad.2@4550,3432.6 | length 627.2
  Bottom Layer w10: pad.2@4550,3432.6 4757.6,3432.6 DL12.1 4955.98,3630.98 D4.2@5095,3630.98
AND_OUT1: D1.1@3220,3462.01 D2.1@3355,3462.01 DL7.1 pad.2@3885,3570 R1.1 | length 1117.9
  Bottom Layer w10: D1.1@3220,3462.01 3287.5,3462.01 ; D2.1@3355,3462.01 3287.5,3462.01 ; R1.1 3710,3405.91 3655,3460.91 DL7.1 ; pad.2@3885,3570 3823.79,3570 3768.79,3515 DL7.1 ; 3287.5,3462.01 3287.5,3618.48 3318.28,3649.25 3520.75,3649.25 DL7.1
AND_OUT2: D3.1@5255,3500 D4.1@5095,3505 DL13.1 pad.2@5695,3585 R2.1 | length 876
  Bottom Layer w20: D4.1@5095,3505 5250,3505 5255,3500 5360.26,3500 5395.26,3535 DL13.1 ; R2.1 5381.61,3628.39 DL13.1 ; pad.2@5695,3585 5618.79,3585 5568.79,3535 DL13.1
GND: D1.2@2945,2035 D2.2@3635,2035 D3.2@4760,2045 D4.2@5460,2040 D21.2 DL5.2 DL6.2 DL7.2 DL8.2 DL9.2 DL10.2 DL11.2 DL12.2 DL13.2 DL14.2 DL15.2 DL16.2 DL17.2 DL18?.2 DL19.2 DL20.2 DL22.2 J?.A12 J?.B12 Q3.2 Q4.2 R9.1 R10.1 R19.1 R20.1 SW1.1 SW2.1 SW3.1 SW4.1 SW5.1 SW6.1 | length 19815
  Top Layer w10: DL6.2 2982.5,3477.5 2982.5,3202.38 2965,3184.88 DL9.2@2965,3170 ; DL5.2 3074.14,3705 3195,3825.86 ; D1.2@2945,2035 2997.5,2087.5 2997.5,2377.5 DL18?.2 2961.21,2425 2997.5,2461.29 2997.5,2552.5 DL17.2 3002.5,2652.5 3002.5,2927.5 DL8.2 3002.5,3022.5 3002.5,3122.5 DL9.2 ; SW1.1@3073.43,4357.7 3073.43,4132.3 3073.43,4121.97 3195,4000.39 3195,3825.86 ; SW2.1@3463.43,4355.39 3463.43,4130 3463.43,4049.82 3535,3978.25 3535,3820 ; DL19.2 3640,2522.18 3590,2572.18 3590,3005 DL10.2 3702.5,3117.5 3702.5,3567.5 DL7.2 ; SW3.1@3843.43,4355.39 3843.43,4130 3843.43,4044.82 3930,3958.25 3930,3820 ; SW4.1@4218.43,4355 4218.43,4129.61 4218.43,4054.82 4325,3948.25 4325,3820 ; SW5.1@4593.43,4357.7 4593.43,4132.3 4593.43,4049.82 4695,3948.25 4695,3820 ; DL11.2 4802.5,3672.5 4802.5,3577.5 DL12.2 4807.5,3487.5 4807.5,3207.5 4800,3200 4847.5,3152.5 4847.5,3077.5 DL15.2 ; D3.2@4760,2045 4812.5,2097.5 4812.5,2170 ; DL20.2 4812.5,2347.5 4812.5,2170 ; D21.2 4847.5,2707.5 4847.5,2907.5 DL15.2@4780,2975 ; SW6.1@4965,4360.39 4965,4135 4965,4124.67 5085,4004.67 5085,3820 ; R20.1 5365.91,4251.61 5396.61,4251.61 ; R19.1 5396.61,4251.61 ; D4.2@5485,2040 5355,2170 4812.5,2170 ; v1(5775,4055) 5706.73,3986.73 5680.76,3986.73 ; 3195,3825.86 3200.86,3820 3535,3820 ; 3535,3820 3930,3820 ; 3930,3820 4325,3820 ; 4325,3820 4695,3820 ; 4695,3820 5085,3820 ; 5085,3820 5419.13,3820 5585.87,3986.73 J?.B12 5680.76,3986.73 ; 5396.61,4251.61 5401.89,4256.89 5401.89,4343.74 5422.21,4364.06 5487.79,4364.06 5543.29,4308.56 5543.29,4215.1 5555.12,4203.27 J?.A12 5599.71,4209.24 5669.14,4209.24 5680.76,4197.63 5680.76,3986.73
  Bottom Layer w10: DL6.2 3254.99,3525 3265.51,3535.52 3265.51,3640.47 3238.97,3667.01 2972.99,3667.01 DL5.2 3565,3705 DL7.2 ; D1.2@2945,2035 3078.6,2035 3168.41,1945.2 Q3.2 3545.2,1945.2 D2.2@3635,2035 ; DL9.2 3483.28,3170 3583.28,3070 DL10.2 ; R10.1 3588.23,2571.77 DL19.2 ; DL11.2 4811.57,3776.57 5408.5,3776.57 5422.72,3762.35 5422.72,3687.28 DL13.2 5614.85,3774.85 5749.85,3774.85 5815,3840 5815,4039.14 5806.8,4047.35 5782.65,4047.35 v1(5775,4055) ; D3.2@4760,2045 4844.8,1960.2 Q4.2 ; DL20.2 4702.5,2457.5 4702.5,2577 4755.5,2630 D21.2 4904.25,2764.25 5280.75,2764.25 5450,2595 DL22.2 ; DL14.2@4800,3200 5230,3200 5340,3090 DL16.2@5440,3090 ; R9.1 5390,3140 5423.91,3106.09 5424.03,3106.09 5440,3090.12 DL16.2@5440,3090 ; DL16.2 DL16.2@5440,3090
IN1: pad.2@2970,3970 SW1.2 | length 389.8
  Top Layer w20: pad.2@2970,3970 2972.5,3972.5 2972.5,4129.8 2975,4132.3 SW1.2@2975,4357.7
IN2: pad.2@3365,3960 SW2.2 | length 395.4
  Top Layer w10: pad.2@3365,3960 3365,4130 SW2.2@3365,4355.39
IN3: pad.2@3740,3960 SW3.2 | length 397.5
  Top Layer w20: pad.2@3740,3960 3742.5,3962.5 3742.5,4127.5 3745,4130 SW3.2@3745,4355.39
IN4: pad.2@4125,3960 SW4.2 | length 397.1
  Top Layer w20: SW4.2@4120,4355 4120,4129.61 4122.5,4127.11 4122.5,3962.5 pad.2@4125,3960
IN5: pad.2@4495,3960 SW5.2 | length 397.7
  Top Layer w20: pad.2@4495,3960 4495,4132.3 SW5.2@4495,4357.7
IN6: pad.2@4880,3960 SW6.2 | length 410.1
  Top Layer w20: SW6.2@4866.57,4133.98 4866.57,3972.4 pad.2@4878.98,3960 ; SW6.2@4866.57,4135 4859.86,4141.71 4859.86,4353.68 SW6.2@4866.57,4360.39
NetD9_2: D9.2 D11.2 R12.1 | length 1001.2
  Bottom Layer w10: D11.2 3205.51,2654.49 3205.51,2626.49 3225.51,2606.49 3225.51,2432.49 3288.28,2369.72 3361.72,2369.72 3370.51,2378.51 3370.51,2607.47 3352.98,2625 3315.47,2625 3273.63,2666.84 3273.63,2675.13 3279.49,2680.98 D9.2 3325,2670.51 3350.51,2645 R12.1
NetD10_1: D10.1 D12.1 Q1.2 | length 398.1
  Bottom Layer w10: D12.1 3182.01,2305 D10.1 3388.9,2305 3516.5,2432.6 Q1.2
NetD13_2: D13.2 D14.2 R14.1 | length 1177.1
  Bottom Layer w10: D13.2 5000,2637.24 4954.49,2591.73 4954.49,2544.13 4892.86,2482.5 4731.29,2482.5 4722.5,2491.29 4722.5,2568.71 4736.29,2582.5 4789.68,2582.5 4870.26,2663.09 4870.26,2663.66 4950.85,2744.25 5049.15,2744.25 5075.51,2717.89 5075.51,2674.96 5099.49,2650.98 D14.2 5145,2635.24 5175.24,2605 R14.1
NetD15_1: D15.1 D16.1 Q2.2 | length 561.2
  Bottom Layer w10: D16.1 D15.1 5145,2287.76 5202.31,2345.06 5202.31,2480.02 5234.1,2511.81 5285.9,2511.81 5329.16,2468.55 5329.16,2454.41 5335.97,2447.6 Q2.2
NetJ?_A5: J?.A5 R20.2 | length 461.5
  Top Layer w10: R20.2 5354.09,4328.39 5318.43,4292.72 5318.43,4224.73 5467.84,4075.32 J?.A5
NetJ?_B5: J?.B5 R19.2 | length 296.6
  Top Layer w10: R19.2 5505,4278.39 5505,4160 5541.54,4123.46 5584.96,4123.46 J?.B5
NetQ1_1: Q1.1 R12.2 | length 139.3
  Bottom Layer w10: Q1.1 3524.37,2640.98 R12.2
NetQ2_1: Q2.1 R14.2 | length 85.2
  Bottom Layer w10: Q2.1 5345,2528.66 R14.2
NetQ3_1: Q3.1 R15.1 | length 118.1
  Bottom Layer w10: Q3.1 3302.87,2020 3309.69,2026.81 3309.69,2034.69 3335.94,2060.94 3335.94,2094.33 R15.1
NetQ4_1: Q4.1 R18.1 | length 102.7
  Bottom Layer w10: R18.1 5098.39,2058.74 5122.13,2035 Q4.1
NetR3_1: R3.1 SW1.3 | length 326.1
  Top Layer w10: SW1.3@2876.57,4132.3 SW1.3@2876.57,4357.7
  Bottom Layer w10: v1(2875,4285) 2973.39,4285 R3.1
NetR4_1: R4.1 SW2.3 | length 331.8
  Top Layer w10: SW2.3@3266.57,4130 SW2.3@3266.57,4355.39
  Bottom Layer w10: v1(3265,4275) 3366.61,4275 R4.1
NetR5_1: R5.1 SW3.3 | length 325.8
  Top Layer w10: SW3.3@3646.57,4130 SW3.3@3646.57,4355.39
  Bottom Layer w10: v1(3645,4280) 3743.92,4280 R5.1
NetR6_1: R6.1 SW4.3 | length 331.8
  Top Layer w10: SW4.3@4021.57,4129.61 SW4.3@4021.57,4355
  Bottom Layer w10: v1(4020,4275) 4121.61,4275 R6.1
NetR7_1: R7.1 SW5.3 | length 323.9
  Top Layer w10: SW5.3@4396.57,4132.3 SW5.3@4396.57,4357.7
  Bottom Layer w10: v1(4400,4275) 4486.61,4275 R7.1
NetR8_1: R8.1 SW6.3 | length 316.1
  Top Layer w10: SW6.3@4768.15,4135 SW6.3@4768.15,4360.39
  Bottom Layer w10: v1(4770,4280) 4858.39,4280 R8.1
NOT_IN: D1.1@2945,1935 pad.2@2740,1975 R15.2 | length 1029.8
  Top Layer w20: pad.2@2762.5,1952.5 2780,1935 D1.1@2945,1935
  Top Layer w30: pad.2@2740,1975 pad.2@2762.5,1952.5
  Bottom Layer w20: pad.2@2740,1975 2840.19,2075.19 2892.5,2075.19 2987.31,2170 3392.69,2170 3417.72,2144.98 3417.72,2120.67 R15.2
NOT_IN1: D3.1@4760,1945 pad.2@4550,1990 R18.2 | length 703.1
  Bottom Layer w10: pad.2@4550,1990 4570.43,1969.57 4711.64,1969.57 4711.64,1950.86 4717.5,1945 4760,1945 D3.1@4732.5,1972.5 ; 4711.64,1972.5 4711.64,2063.81 4767.82,2120 R18.2
NOT_OUT: D2.1@3635,1935 pad.2@3870,1980 Q3.3 R16.1 | length 1064.3
  Bottom Layer w20: Q3.3 3392.54,1982.6 3499.94,2090 3637.61,2090 3649.33,2101.72 3649.33,2129.33 R16.1 3725.77,2140 3870,1995.77 3870,1980 3811.49,1980 3766.49,1935 D2.1@3635,1935
NOT_OUT1: D4.1@5460,1940 pad.2@5685,1985 Q4.3 R17.1 | length 780
  Bottom Layer w10: Q4.3 5250,1997.6 ; R17.1 5246.61,2000.98 5250,1997.6 ; pad.2@5685,1985 5530,1985 5485,1940 5427.4,1997.6 5250,1997.6
OR_IN1: D5.1 DL8.1 pad.2@2740,2892.6 | length 664.5
  Bottom Layer w20: pad.2@2740,2892.6 2937.4,2892.6 3000,2830 3233.74,2830 3325,2921.26 D5.1
OR_IN2: D6.1 DL9.1 pad.2@2735,3147.6 | length 536.5
  Bottom Layer w20: pad.2@2735,3147.6 2768.05,3147.6 2845.65,3070 DL9.1 3057.76,3070 3175,2952.76 D6.1
OR_IN3: D7.1 DL14.1 pad.2@4555,3155 | length 564.9
  Bottom Layer w20: pad.2@4555,3155 4745,3155 4800,3100 4937.99,2962.01 D7.1
OR_IN4: D8.1 DL15.1 pad.2@4555,2885 | length 720.1
  Bottom Layer w20: pad.2@4555,2885 DL15.1@4775,2885 ; DL15.1 DL15.1@4775,2885 ; DL15.1@4790,2885 DL15.1@4775,2885 ; D8.1 5185,2944.25 5100.75,2860 4800,2860 DL15.1@4775,2885
OR_OUT1: D5.2 D6.2 DL10.1 pad.2@3875,3020 R10.2 | length 883.4
  Bottom Layer w20: D6.2 D5.2 3417.99,2970 DL10.1 ; R10.2 3665,2960 DL10.1 ; pad.2@3875,3020 3816.49,3020 3766.49,2970 3665,2970 DL10.1
OR_OUT2: D7.2 D8.2 DL16.1 pad.2@5685,3050 R9.2 | length 985.8
  Bottom Layer w20: D7.2 5182.99,3087.99 D8.2 5250.38,3085.98 5346.37,2990 DL16.1 ; R9.2 5513.28,3185 5525,3173.28 5525,3060 DL16.1 ; pad.2@5685,3050 5626.03,3050 5566.03,2990 DL16.1
XOR_IN1: D9.1 D10.2 DL17.1 pad.2@2730,2595 | length 1101.2
  Bottom Layer w20: pad.2@2730,2595 2825,2500 DL17.1 3028,2500 3108,2580 3117.77,2580 3129.49,2591.72 3129.49,2734.54 3141.2,2746.26 3218.8,2746.26 3248.63,2716.43 3248.63,2618.73 3250.51,2616.84 3250.51,2581.49 3277,2555 D9.1 D10.2
XOR_IN2: D11.1 D12.2 DL18?.1 pad.2@2735,2340 | length 626.2
  Bottom Layer w20: pad.2@2735,2340 2935,2340 DL18?.1 3087.76,2325 3180,2417.24 D12.2 D11.1
XOR_IN3: D13.1 D16.2 DL20.1 pad.2@4555,2335 | length 645.9
  Top Layer w10: pad.2@4555,2335 4585,2295 DL20.1
  Bottom Layer w20: DL20.1 4912.76,2295 5000,2382.24 D16.2 D13.1
XOR_IN4: D14.1 D15.2 D21.1 pad.2@4555,2595 | length 1032.3
  Top Layer w10: pad.2@4555,2595 4592.5,2557.5 4742.5,2557.5 D21.1
  Bottom Layer w20: D21.1 4905.01,2530 4929.49,2554.48 4929.49,2687.54 4961.2,2719.25 5038.8,2719.25 5050.51,2707.54 5050.51,2635.24 5145,2540.75 D14.1 D15.2
XOR_OUT1: DL19.1 pad.2@3875,2470 Q1.3 R11.1 | length 607
  Top Layer w20: DL19.1 3766.49,2420 3816.49,2470 pad.2@3875,2470
  Bottom Layer w20: Q1.3 3590,2470 DL19.1 3640.93,2419.07 3640.93,2378.36 3703.39,2315.91 R11.1
XOR_OUT2: DL22.1 pad.2@5685,2490 Q2.3 R13.1 | length 735.8
  Bottom Layer w20: Q2.3 5260,2395 5280,2375 5390,2375 DL22.1 ; R13.1 5510,2375 DL22.1 ; pad.2@5685,2490 5623.79,2490 5568.79,2435 DL22.1
pads on no net: J?.S1 J?.S2 J?.S3 J?.S4

## Polygon pours and split planes (outlines as drawn)
GND on Bottom Layer "GND_L02_P000" (solid, pour order 0): 2505,4315 2595,4405 5790,4405 5880,4315 5880,1900 5785,1805 5780,1810 2615,1810 2500,1925
GND on Top Layer "GND_L01_P001" (solid, pour order 1): 2515,4315 2595,4395 2595,4405 5795,4405 5880,4320 5880,1895 5795,1810 2590,1810 2496.74,1903.26

## Keep-outs
Top Layer:
  the board outline again, w10

## Silkscreen, mask and mechanical layers (free items; w line width, h text height)
Top Overlay:
  circle w10: c3435,1980 r15
  circle w10: c5267.82,1985.4 r15
  lines w10: 2495,2185 5880,2185 ; 2495,3820 5880,3820 ; 2500,2760 5875,2760 ; 2500,3285 5880,3285 ; 3020,3650 3175,3650 ; 3025,1985 3150,1985 ; 3025,3480 3170,3480 ; 3030,2550 3185,2550 ; 3035,2380 3180,2380 ; 3070,3105 3225,3105 ; 3075,2935 3220,2935 ; 3115,2315 ccw(c3044.61,2465) 3115,2615 ; 3425,2465 3545,2465 ; 3425,3020 3545,3020 ; 3445,3565 3565,3565 ; 3460,1980 3555,1980 ; 3715,4400 3720,4405 ; 4837.82,1995.4 4992.82,1995.4 ; 4840,3660.27 4995,3660.27 ; 4845,3490.27 4990,3490.27 ; 4850,2565 5005,2565 ; 4855,2395 5000,2395 ; 4890,3125.27 5045,3125.27 ; 4895,2955.27 5040,2955.27 ; 4935,2330 ccw(c4864.61,2480) 4935,2630 ; 5245,2480 5365,2480 ; 5245,3040.27 5365,3040.27 ; 5265,3575.27 5385,3575.27 ; 5282.82,1985.4 5380,1985.4 ; 3155,2870 ccw(c3084.61,3020) 3155,3170 3285,3170 cw(c3266.92,3020) 3285,2870 3155,2870 ; 3160,1830 3420,1980 3160,2130 3160,1830 ; 3160,2315 ccw(c3059.53,2465) 3160,2615 3290,2615 cw(c3271.92,2465) 3290,2315 3160,2315 ; 3175,3410 3305,3410 ccw(c3286.92,3560) 3305,3710 3175,3710 3175,3410 ; 4975,2890.27 ccw(c4904.61,3040.27) 4975,3190.27 5105,3190.27 cw(c5086.92,3040.27) 5105,2890.27 4975,2890.27 ; 4980,2330 ccw(c4879.37,2480) 4980,2630 5110,2630 cw(c5091.92,2480) 5110,2330 4980,2330 ; 4992.82,1835.4 4992.82,2135.4 5252.82,1985.4 4992.82,1835.4 ; 4995,3420.27 4995,3720.27 5125,3720.27 cw(c5106.92,3570.27) 5125,3420.27 4995,3420.27
  text "AND" at 5045,3550.27 h60
  text "AND" at 3225,3540 h60
  text "OR" at 5105,3020 h60
  text "OR" at 3280,3000 h60
  text "XOR" at 5080,2455 h50
  text "XOR" at 3260,2440 h50
  text "NOT" at 5020,1955 h60
  text "NOT" at 3190,1950 h60